# Allegro board Arena_bottom_V1.brd

Outline 298.45 x 206.38 mm; copper layers: TOP, LAYER 1, LAYER 2, LAYER 3, LAYER 4, LAYER 5, BOTTOM. Coordinates in mm from the lower left corner of the outline.
Outline path: 0,193.68 0,81.46 arc(0.97,76.6) 3.72,72.48 72.48,3.72 arc(76.6,0.97) 81.46,0 216.99,0 arc(221.85,0.97) 225.97,3.72 294.73,72.48 arc(297.48,76.6) 298.45,81.46 298.45,193.68 arc(294.73,202.66) 285.75,206.38 253.37,206.38 arc(248.87,204.52) 247.01,200.03 247.01,198.87 arc(149.23,25.4) 51.44,198.87 51.44,200.03 arc(49.58,204.52) 45.09,206.38 12.7,206.38 arc(3.72,202.66) 0,193.68

## Design rules (mm)
constraint set DEFAULT: min track width 0.127

## Placement (name value [footprint] x y rotation side)
C1  10uF  [1206]  263.3 198.74 289.6 bottom
C2  10uF  [1206]  274.55 111.49 250 bottom
C3  0.1uF  [EIA0805]  237.3 17.74 45 top
C4  10uF  [1206]  227.3 37.49 210 bottom
C5  0.1uF  [EIA0805]  269.3 49.74 45 top
C6  0.1uF  [EIA0805]  286.6 126.12 90 top
C7  0.1uF  [0805]  288.3 84.24 270 top
C8  10uF  [1206]  257.55 70.49 230.5 bottom
C9  10uF  [1206]  21.8 123.2 90 bottom
C10  0.1uF  [EIA0805]  25.49 167.15 70 bottom
C11  10uF  [1206]  187.55 16.99 190 bottom
C12  0.1uF  [EIA0805]  261.8 198.24 289.4 bottom
C13  10uF  [1206]  276.8 156.24 270 bottom
C14  0.1uF  [EIA0805]  275.05 156.24 270 bottom
C15  10uF  [1206]  35.05 80.49 110 bottom
C16  0.1uF  [EIA0805]  273.05 112.24 250 bottom
C17  10uF  [1206]  23.83 167.78 70 bottom
C18  0.1uF  [EIA0805]  36.55 81.24 110 bottom
C19  0.1uF  [EIA0805]  272.69 68.82 225 top
C20  10uF  [1206]  143.3 11.24 170 bottom
C21  10uF  [1206]  99.8 20.99 150 bottom
C22  0.1uF  [EIA0805]  100.55 22.49 150 bottom
C23  10uF  [1206]  62.3 45.24 130 bottom
C24  0.1uF  [EIA0805]  252.8 33.24 45 top
C25  0.1uF  [EIA0805]  269.83 65.96 45 top
C26  0.1uF  [EIA0805]  256.3 71.49 230 bottom
C27  0.1uF  [EIA0805]  239.8 20.24 225 top
C28  0.1uF  [EIA0805]  226.55 38.99 210 bottom
C29  0.1uF  [EIA0805]  271.8 52.24 225 top
C30  0.1uF  [EIA0805]  23.58 123.2 90 bottom
C31  0.1uF  [EIA0805]  286.6 129.68 270 top
C32  0.1uF  [EIA0805]  187.3 18.74 190 bottom
C33  0.1uF  [EIA0805]  286.3 94.74 90 top
C34  0.1uF  [EIA0805]  63.55 46.24 130 bottom
C35  0.1uF  [EIA0805]  255.3 35.74 225 top
C36  0.1uF  [EIA0805]  143.55 12.99 170 bottom
C37  0.1uF  [EIA0805]  19.82 188.09 180 top
C38  10uF  [1206]  19.18 192.54 180 top
C39  10uF/6.3/Elec  [1206]  8.39 163.48 270 top
C40  0.001uF/X5R  [EIA0805]  11.09 164.12 270 top
C41  0.1uF/X5R  [EIA0805]  6 164.12 270 top
C42  2.2uF/60/Elec  [1206]  2.35 153.48 270 top
C43  0.01uF/X5R  [EIA0805]  7.91 154.11 270 top
C44  0.1uF/X5R  [EIA0805]  5.37 154.11 270 top
J1  CONN15  [HDR-1X15]  25.13 129.54 90 top
J2  CONN15  [HDR-1X15]  273.32 149.86 270 top
J3  CONN15  [HDR-1X15]  250.82 67.72 230 top
J4  CONN15  [HDR-1X15]  29.14 172.59 70 top
J5  CONN15  [HDR-1X15]  60.7 52.15 130 top
J6  CONN15  [HDR-1X15]  137.68 15.73 170 top
J7  CONN15  [HDR-1X15]  220.07 37.31 210 top
J8  CONN15  [HDR-1X15]  262.36 191.69 290 top
J9  CONN15  [HDR-1X15]  269.31 106.81 250 top
J10  CONN15  [HDR-1X15]  36.09 87.71 110 top
J11  CONN15  [HDR-1X15]  180.78 19.26 190 top
J12  CONN15  [HDR-1X15]  95.98 27.15 150 top
J13  CONN15  [HDR-1X15]  24.36 174.33 70 top
J14  CONN15  [HDR-1X15]  20.05 129.54 90 top
J15  CONN15  [HDR-1X15]  31.31 85.97 110 top
J16  CONN15  [HDR-1X15]  56.8 48.88 130 top
J17  CONN15  [HDR-1X15]  93.44 22.75 150 top
J18  CONN15  [HDR-1X15]  136.8 10.72 170 top
J19  CONN15  [HDR-1X15]  181.66 14.25 190 top
J20  CONN15  [HDR-1X15]  222.61 32.91 210 top
J21  CONN15  [HDR-1X15]  254.71 64.45 230 top
J22  CONN15  [HDR-1X15]  274.09 105.07 250 top
J23  CONN15  [HDR-1X15]  278.4 149.86 270 top
J24  CONN15  [HDR-1X15]  267.14 193.43 290 top
J25  A35051-ND (68pin, 1.27mm pitch, Through hold, A113405-ND)  [SMV_2X20]  286.53 179.88 0 top
J26  HEADER 3  [PJ102A]  22.18 200.26 0 top
L1  Ferrite Bead/5-15Ohm  [EIA2512]  13.29 200.04 90 top
L2  Ferrite Bead/5-15Ohm  [EIA2512]  281.26 186.61 90 top
L3  Ferrite Bead/5-15Ohm  [EIA2512]  2.35 161.89 270 top
L4  Ferrite Bead/5-15Ohm  [EIA2512]  281.26 199.28 90 top
M1  TEST POINT  [8-32]  291.42 199.95 0 top
M2  TEST POINT  [8-32]  7.26 199.95 0 top
M3  TEST POINT  [8-32]  83.19 10.16 0 top
M4  TEST POINT  [8-32]  6.99 114.3 0 top
M5  TEST POINT  [8-32]  6.99 190.5 0 top
M6  TEST POINT  [8-32]  215.27 10.16 0 top
M7  TEST POINT  [8-32]  291.47 190.5 0 top
M8  TEST POINT  [8-32]  291.47 114.3 0 top
NOREF  -  []  1.23 76 0 top
NOREF#2  -  []  208.87 0.39 90 top
NOREF#3  -  []  50.92 202.53 0 top
NOREF#4  -  []  298.45 76.2 0 top
NOREF#5  -  []  297.27 199.03 0 top
NOREF#6  -  []  0 193.68 0 top
NOREF#7  -  []  45.45 187.61 0 top
NOREF#8  -  []  75.45 1.51 0 top
Q1  MTD4P06  [SOT-23]  274.05 203.74 0 top
Q3  MTD4P06  [SOT-23]  274.05 197.24 0 top
R1  27  [EIA0805]  33.8 176.24 160 bottom
R2  27  [EIA0805]  28.3 134.74 180 bottom
R3  27  [EIA0805]  37.3 93.24 200 bottom
R4  27  [EIA0805]  59.8 57.74 220 bottom
R5  27  [EIA0805]  92.8 31.74 240 bottom
R6  27  [EIA0805]  133.3 19.24 260 bottom
R7  27  [EIA0805]  175.3 21.24 280 bottom
R8  27  [EIA0805]  214.3 37.24 300 bottom
R9  27  [EIA0805]  245.3 65.74 320 bottom
R10  27  [EIA0805]  264.8 102.74 340 bottom
R11  27  [EIA0805]  270.8 144.74 0 bottom
R12  27  [EIA0805]  261.8 185.74 20 bottom
R13  200  [EIA0805]  269.8 200.49 0 top
R14  20K  [EIA0805]  269.8 202.49 0 top
R17  200  [EIA0805]  270.3 196.24 0 top
R18  20K  [EIA0805]  274.05 200.49 180 top
R19  4.7K  [EIA0805]  266.66 63.51 135 top
R20  4.7K  [EIA0805]  274.05 193.74 0 top
R21  4.7K  [EIA0402]  282.3 157.24 180 bottom
R22  4.7K  [EIA0402]  282.3 155.74 180 bottom
R23  4.7K  [EIA0402]  295.8 155.74 0 bottom
R24  4.7K  [EIA0402]  295.8 157.24 0 bottom
R25  4.7K  [EIA0402]  295.8 158.24 0 bottom
R26  4.7K  [EIA0402]  295.8 159.74 0 bottom
R27  4.7K  [EIA0402]  295.8 160.74 0 bottom
R28  4.7K  [EIA0402]  295.8 162.24 0 bottom
R29  4.7K  [EIA0402]  295.8 167.24 0 bottom
R30  4.7K  [EIA0402]  295.8 168.74 0 bottom
R31  4.7K  [EIA0402]  295.8 169.74 0 bottom
R32  4.7K  [EIA0402]  295.8 171.24 0 bottom
R33  4.7K  [EIA0402]  282.3 162.24 180 bottom
R34  4.7K  [EIA0402]  282.3 161.24 180 bottom
R35  4.7K  [EIA0402]  282.3 159.74 180 bottom
R36  4.7K  [EIA0402]  282.3 158.24 180 bottom
R37  4.7K  [EIA0402]  225.3 43.24 300 bottom
R38  4.7K  [EIA0402]  174.8 23.74 100 bottom
R39  4.7K  [EIA0402]  133.8 22.24 80 bottom
R40  4.7K  [EIA0402]  94.8 31.24 330 bottom
R41  4.7K  [EIA0402]  61.8 56.74 310 bottom
R42  4.7K  [EIA0402]  38.8 91.74 290 bottom
R43  4.7K  [EIA0402]  29.3 132.74 270 bottom
R44  4.7K  [EIA0402]  33.8 174.24 250 bottom
R49  4.7K  [EIA0402]  260.3 187.24 110 bottom
R50  4.7K  [EIA0402]  269.8 146.74 90 bottom
R51  4.7K  [EIA0402]  290.3 84.24 270 top
R52  4.7K  [EIA0402]  253.8 75.24 320 bottom
R57  4.7K  [EIA0402]  295.8 172.24 0 bottom
R58  4.7K  [EIA0402]  295.8 173.74 0 bottom
R59  4.7K  [EIA0402]  295.8 174.74 0 bottom
R60  4.7K  [EIA0402]  295.8 176.24 0 bottom
RN1  20  [SSOP16]  227.92 16.75 45 top
RN2  20  [SSOP16]  259.67 48.82 45 top
RN3  20  [SSOP16]  292.38 137.4 270 top
RN4  20  [SSOP16]  243.8 32.62 45 top
RN5  20  [SSOP16]  282.85 69.45 225 top
RN6  20  [SSOP16]  292.38 100.25 270 top
U1  SN74LVC8T245  [TSSOP24]  234.91 23.1 225 top
U2  SN74LVC8T245  [TSSOP24]  292.06 127.87 90 top
U3  SN74LVC8T245  [TSSOP24]  266.66 54.85 225 top
U4  SN74LVC8T245  [TSSOP24]  250.47 38.66 225 top
U5  SN74LVC8T245  [TSSOP24]  275.55 63.42 45 top
U6  SN74LVC8T245  [TSSOP24]  292.06 91.04 90 top
U7  LT1764  [DD5]  3.3 169.51 90 top

## Library data of the parts
C1 C2 C4 C8 C9 C11 C13 C15 C17 C20 C21 C23 C38 = CAPACITOR POL
C3 C5-C7 C10 C12 C14 C16 C18 C19 C22 C24-C37 = CAPACITOR NON-POL
C39 C42 = CAPACITOR
C40 C41 C43 C44 = CAP NP
J1-J24 = CONN RECT 15_7
J25 = HEADER 34x2_1
J26 = HEADER 3
L1-L4 = BEADARR_4
M1-M8 = TEST POINT
Q1 Q3 = MTD4P06
R1-R14 R17-R44 R49-R52 R57-R60 = RESISTOR
RN1-RN6 = RESNW_IS_8
U1-U6 = SN7474LVC8T245
U7 = LT1764

## Footprints (pads in the part's own frame, mm; a bottom-side part is the same pattern mirrored in y, then rotated)
8-32
  round 8 hole 4.305: 1(0,0)
0805
  rect 1.1x1.4 smd: 1(-1,0) 2(1,0)
1206
  rect 1.524x1.524 smd: 1(-1.651,0) 2(1.651,0)
DD5
  rect 2.286x1.067 smd: 1(0,0) 2(0,-1.702) 3(0,-3.404) 4(0,-5.105) 5(0,-6.807)
  rect 8.89x10.668 smd: 6(9.906,-3.378)
EIA0402
  rect 0.5x0.65 smd: 1(-0.5,0) 2(0.5,0)
EIA0805
  rect 1.1x1.4 smd: 1(-1,0) 2(1,0)
EIA2512
  rect 1.651x3.175 smd: 1(-3.239,0) 2(3.239,0)
HDR-1X15
  rect 1.524x1.524 hole 1.016: 1(-7.62,0)
  round 1.524 hole 1.016: 2(-5.08,0) 3(-2.54,0) 4(0,0) 5(2.54,0) 6(5.08,0) 7(7.62,0) 8(10.16,0) 9(12.7,0) 10(15.24,0) 11(17.78,0) 12(20.32,0) 13(22.86,0) 14(25.4,0) 15(27.94,0)
PJ102A
  rect 5x2 hole 3.05x0.76: 1(0,-3) 2(0,3)
  rect 2x5 hole 0.76x3.05: 3(-4.7,0)
SMV_2X20
  round 0.2 hole 0.25: (2.31,1.54) (2.31,-25.69)
  rect 4.11x0.73 smd: 1(0,0) 2(0,-1.27) 3(0,-2.54) 4(0,-3.81) 5(0,-5.08) 6(0,-6.35) 7(0,-7.62) 8(0,-8.89) 9(0,-10.16) 10(0,-11.43) 11(0,-12.7) 12(0,-13.97) 13(0,-15.24) 14(0,-16.51) 15(0,-17.78) 16(0,-19.05) 17(0,-20.32) 18(0,-21.59) 19(0,-22.86) 20(0,-24.13) 21(4.62,-24.13) 22(4.62,-22.86) 23(4.62,-21.59) 24(4.62,-20.32) 25(4.62,-19.05) 26(4.62,-17.78) 27(4.62,-16.51) 28(4.62,-15.24) 29(4.62,-13.97) 30(4.62,-12.7) 31(4.62,-11.43) 32(4.62,-10.16) 33(4.62,-8.89) 34(4.62,-7.62) 35(4.62,-6.35) 36(4.62,-5.08) 37(4.62,-3.81) 38(4.62,-2.54) 39(4.62,-1.27) 40(4.62,0)
SOT-23
  rect 1.016x1.219 smd: 1(-0.953,-1.143) 2(0.953,-1.143) 3(0,1.143)
SSOP16
  rect 1.651x0.33 smd: 1(-3.505,2.276) 2(-3.505,1.626) 3(-3.505,0.975) 4(-3.505,0.325) 5(-3.505,-0.325) 6(-3.505,-0.975) 7(-3.505,-1.626) 8(-3.505,-2.276) 9(3.505,-2.276) 10(3.505,-1.626) 11(3.505,-0.975) 12(3.505,-0.325) 13(3.505,0.325) 14(3.505,0.975) 15(3.505,1.626) 16(3.505,2.276)
TSSOP24
  rect 1.651x0.33 smd: 1(-2.87,3.576) 2(-2.87,2.926) 3(-2.87,2.276) 4(-2.87,1.626) 5(-2.87,0.975) 6(-2.87,0.325) 7(-2.87,-0.325) 8(-2.87,-0.975) 9(-2.87,-1.626) 10(-2.87,-2.276) 11(-2.87,-2.926) 12(-2.87,-3.576) 13(2.87,-3.576) 14(2.87,-2.926) 15(2.87,-2.276) 16(2.87,-1.626) 17(2.87,-0.975) 18(2.87,-0.325) 19(2.87,0.325) 20(2.87,0.975) 21(2.87,1.626) 22(2.87,2.276) 23(2.87,2.926) 24(2.87,3.576)

## Nets
3.3VDC: C25.1 C27.1 C29.1 C31.1 C33.1 C35.1 C42.1 C43.1 C44.1 L3.2 R19.2 R21.2 R22.2 R23.2 R24.2 R25.2 R26.2 R27.2 R28.2 R29.2 R30.2 R31.2 R32.2 R33.2 R34.2 R35.2 R36.2 R57.2 R58.2 R59.2 R60.2 U1.1 U1.2 U2.23 U2.24 U3.1 U3.2 U4.1 U4.2 U5.1 U5.2 U6.23 U6.24
5VDC: C1.1 C2.1 C3.1 C4.1 C5.1 C6.1 C7.1 C8.1 C9.1 C10.1 C11.1 C12.1 C13.1 C14.1 C15.1 C16.1 C17.1 C18.1 C19.1 C20.1 C21.1 C22.1 C23.1 C24.1 C26.1 C28.1 C30.1 C32.1 C34.1 C36.1 C37.1 C38.1 J1.1 J2.1 J3.1 J4.1 J5.1 J6.1 J7.1 J8.1 J9.1 J10.1 J11.1 J12.1 J13.1 J14.1 J15.1 J16.1 J17.1 J18.1 J19.1 J20.1 J21.1 J22.1 J23.1 J24.1 J26.1 R20.1 R37.2 R38.2 R39.2 R40.2 R41.2 R42.2 R43.2 R44.2 R49.2 R50.2 R51.2 R52.2 U1.23 U1.24 U2.1 U2.2 U3.23 U3.24 U4.23 U4.24 U5.23 U5.24 U6.1 U6.2 U7.1 U7.2
GND: C1.2 C2.2 C3.2 C4.2 C5.2 C6.2 C7.2 C8.2 C9.2 C10.2 C11.2 C12.2 C13.2 C14.2 C15.2 C16.2 C17.2 C18.2 C19.2 C20.2 C21.2 C22.2 C23.2 C24.2 C25.2 C26.2 C27.2 C28.2 C29.2 C30.2 C31.2 C32.2 C33.2 C34.2 C35.2 C36.2 C37.2 C38.2 C39.2 C40.2 C41.2 C42.2 C43.2 C44.2 J1.2 J2.2 J3.2 J4.2 J5.2 J6.2 J7.2 J8.2 J9.2 J10.2 J11.2 J12.2 J13.2 J14.2 J15.2 J16.2 J17.2 J18.2 J19.2 J20.2 J21.2 J22.2 J23.2 J24.2 J26.2 J26.3 L1.1 L2.2 L4.1 M3.1 M4.1 M5.1 M6.1 M7.1 M8.1 Q1.3(S) Q3.3(S) R14.1 R18.1 U1.11 U1.12 U1.13 U1.22(\\O\E\) U2.11 U2.12 U2.13 U2.22(\\O\E\) U3.11 U3.12 U3.13 U3.22(\\O\E\) U4.11 U4.12 U4.13 U4.22(\\O\E\) U5.11 U5.12 U5.13 U5.22(\\O\E\) U6.7 U6.8 U6.9 U6.10 U6.11 U6.12 U6.13 U6.22(\\O\E\) U7.3 U7.6
GND_SIGNAL: J25.14 J25.27 J25.29 J25.39 J25.40 L2.1
CS0: J1.7 J2.7 J3.7 J4.7 J5.7 J6.7 J7.7 J8.7 J9.7 J10.7 J11.7 J12.7 J13.7 J14.7 J15.7 J16.7 J17.7 J18.7 J19.7 J20.7 J21.7 J22.7 J23.7 J24.7 RN5.4
CS1: J1.8 J2.8 J3.8 J4.8 J5.8 J6.8 J7.8 J8.8 J9.8 J10.8 J11.8 J12.8 J13.8 J14.8 J15.8 J16.8 J17.8 J18.8 J19.8 J20.8 J21.8 J22.8 J23.8 J24.8 RN5.3
CS2: J1.9 J2.9 J3.9 J4.9 J5.9 J6.9 J7.9 J8.9 J9.9 J10.9 J11.9 J12.9 J13.9 J14.9 J15.9 J16.9 J17.9 J18.9 J19.9 J20.9 J21.9 J22.9 J23.9 J24.9 RN5.2
CS3: J1.10 J2.10 J3.10 J4.10 J5.10 J6.10 J7.10 J8.10 J9.10 J10.10 J11.10 J12.10 J13.10 J14.10 J15.10 J16.10 J17.10 J18.10 J19.10 J20.10 J21.10 J22.10 J23.10 J24.10 RN5.1
CS4: J1.11 J2.11 J3.11 J4.11 J5.11 J6.11 J7.11 J8.11 J9.11 J10.11 J11.11 J12.11 J13.11 J14.11 J15.11 J16.11 J17.11 J18.11 J19.11 J20.11 J21.11 J22.11 J23.11 J24.11 RN4.4
CS5: J1.12 J2.12 J3.12 J4.12 J5.12 J6.12 J7.12 J8.12 J9.12 J10.12 J11.12 J12.12 J13.12 J14.12 J15.12 J16.12 J17.12 J18.12 J19.12 J20.12 J21.12 J22.12 J23.12 J24.12 RN4.3
CS6: J1.13 J2.13 J3.13 J4.13 J5.13 J6.13 J7.13 J8.13 J9.13 J10.13 J11.13 J12.13 J13.13 J14.13 J15.13 J16.13 J17.13 J18.13 J19.13 J20.13 J21.13 J22.13 J23.13 J24.13 RN4.2
CS7: J1.14 J2.14 J3.14 J4.14 J5.14 J6.14 J7.14 J8.14 J9.14 J10.14 J11.14 J12.14 J13.14 J14.14 J15.14 J16.14 J17.14 J18.14 J19.14 J20.14 J21.14 J22.14 J23.14 J24.14 RN4.1
CS_IN_0: J25.37 R60.1 U5.7
CS_IN_1: J25.36 R59.1 U5.8
CS_IN_2: J25.35 R58.1 U5.9
CS_IN_3: J25.34 R57.1 U5.10
CS_IN_4: J25.33 R32.1 U4.7
CS_IN_5: J25.32 R31.1 U4.8
CS_IN_6: J25.31 R30.1 U4.9
CS_IN_7: J25.30 R29.1 U4.10
EXT_INT: J1.15 J2.15 J3.15 J4.15 J5.15 J6.15 J7.15 J8.15 J9.15 J10.15 J11.15 J12.15 J13.15 J14.15 J15.15 J16.15 J17.15 J18.15 J19.15 J20.15 J21.15 J22.15 J23.15 J24.15 Q3.2 R20.2
EXT_INT_IN: J25.1 R17.1
MISO_0: R1.1 R44.1 U2.3
MISO_1: R2.1 R43.1 U2.4
MISO_2: R3.1 R42.1 U2.5
MISO_3: R4.1 R41.1 U2.6
MISO_4: R5.1 R40.1 U2.7
MISO_5: R6.1 R39.1 U2.8
MISO_6: R7.1 R38.1 U2.9
MISO_7: R8.1 R37.1 U2.10
MISO_8: R9.1 R52.1 U6.3
MISO_9: R10.1 R51.1 U6.4
MISO_10: R11.1 R50.1 U6.5
MISO_11: R12.1 R49.1 U6.6
MISO_OUT_0: J25.13 RN3.8
MISO_OUT_1: J25.12 RN3.7
MISO_OUT_2: J25.11 RN3.6
MISO_OUT_3: J25.10 RN3.5
MISO_OUT_4: J25.9 RN3.4
MISO_OUT_5: J25.8 RN3.3
MISO_OUT_6: J25.7 RN3.2
MISO_OUT_7: J25.6 RN3.1
MISO_OUT_8: J25.5 RN6.8
MISO_OUT_9: J25.4 RN6.7
MISO_OUT_10: J25.3 RN6.6
MISO_OUT_11: J25.2 RN6.5
MOSI_0: J4.5 J13.5 RN1.8
MOSI_1: J1.5 J14.5 RN1.7
MOSI_2: J10.5 J15.5 RN1.6
MOSI_3: J5.5 J16.5 RN1.5
MOSI_4: J12.5 J17.5 RN1.4
MOSI_5: J6.5 J18.5 RN1.3
MOSI_6: J11.5 J19.5 RN1.2
MOSI_7: J7.5 J20.5 RN1.1
MOSI_8: J3.5 J21.5 RN4.8
MOSI_9: J9.5 J22.5 RN4.7
MOSI_10: J2.5 J23.5 RN4.6
MOSI_11: J8.5 J24.5 RN4.5
MOSI_IN_0: J25.26 R28.1 U1.3
MOSI_IN_1: J25.25 R27.1 U1.4
MOSI_IN_2: J25.24 R26.1 U1.5
MOSI_IN_3: J25.23 R25.1 U1.6
MOSI_IN_4: J25.22 R24.1 U1.7
MOSI_IN_5: J25.21 R23.1 U1.8
MOSI_IN_6: J25.20 R22.1 U1.9
MOSI_IN_7: J25.19 R21.1 U1.10
MOSI_IN_8: J25.18 R36.1 U4.3
MOSI_IN_9: J25.17 R35.1 U4.4
MOSI_IN_10: J25.16 R34.1 U4.5
MOSI_IN_11: J25.15 R33.1 U4.6
RESET: J1.3 J2.3 J3.3 J4.3 J5.3 J6.3 J7.3 J8.3 J9.3 J10.3 J11.3 J12.3 J13.3 J14.3 J15.3 J16.3 J17.3 J18.3 J19.3 J20.3 J21.3 J22.3 J23.3 J24.3 Q1.2
RESET_IN: J25.38 R13.1
SCK_0: J4.4 J13.4 RN2.8
SCK_1: J1.4 J14.4 RN2.7
SCK_2: J10.4 J15.4 RN2.6
SCK_3: J5.4 J16.4 RN2.5
SCK_4: J12.4 J17.4 RN2.4
SCK_5: J6.4 J18.4 RN2.3
SCK_6: J11.4 J19.4 RN2.2
SCK_7: J7.4 J20.4 RN2.1
SCK_8: J3.4 J21.4 RN5.8
SCK_9: J9.4 J22.4 RN5.7
SCK_10: J2.4 J23.4 RN5.6
SCK_11: J8.4 J24.4 RN5.5
SCK_IN_0: J25.28 R19.1 U3.3 U3.4 U3.5 U3.6 U3.7 U3.8 U3.9 U3.10 U5.3 U5.4 U5.5 U5.6
N00182: J4.6 J13.6 R1.2
N04213: J1.6 J14.6 R2.2
N04860: J10.6 J15.6 R3.2
N05048: J5.6 J16.6 R4.2
N06135: J12.6 J17.6 R5.2
N06323: J6.6 J18.6 R6.2
N06511: J11.6 J19.6 R7.2
N06699: J7.6 J20.6 R8.2
N07866: J3.6 J21.6 R9.2
N08054: J9.6 J22.6 R10.2
N08430: J8.6 J24.6 R12.2
N65117: J2.6 J23.6 R11.2
N65750: Q1.1 R13.2 R14.2
N124786: C39.1 C40.1 C41.1 L3.1 U7.4 U7.5(SENSE)
N190316: L4.2 M1.1
N207682: Q3.1 R17.2 R18.2
N926808: RN3.9 U2.21
N926809: RN3.10 U2.20
N935118: RN2.9 U3.21
N935119: RN2.10 U3.20
N953908: RN1.9 U1.21
N953909: RN1.10 U1.20
N1284400: L1.2 M2.1
N9268010: RN3.11 U2.19
N9268011: RN3.12 U2.18
N9268012: RN3.13 U2.17
N9268013: RN3.14 U2.16
N9268014: RN3.15 U2.15
N9268015: RN3.16 U2.14
N9351110: RN2.11 U3.19
N9351111: RN2.12 U3.18
N9351112: RN2.13 U3.17
N9351113: RN2.14 U3.16
N9351114: RN2.15 U3.15
N9351115: RN2.16 U3.14
N9539010: RN1.11 U1.19
N9539011: RN1.12 U1.18
N9539012: RN1.13 U1.17
N9539013: RN1.14 U1.16
N9539014: RN1.15 U1.15
N9539015: RN1.16 U1.14
N10228215: RN4.9 U4.21
N10228216: RN4.10 U4.20
N10228217: RN4.11 U4.19
N10228218: RN4.12 U4.18
N10228219: RN4.13 U4.17
N10228220: RN4.14 U4.16
N10228221: RN4.15 U4.15
N10228222: RN4.16 U4.14
N10904015: RN5.9 U5.21
N10904016: RN5.10 U5.20
N10904017: RN5.11 U5.19
N10904018: RN5.12 U5.18
N10904019: RN5.13 U5.17
N10904020: RN5.14 U5.16
N10904021: RN5.15 U5.15
N10904022: RN5.16 U5.14
N11250315: RN6.9 U6.21
N11250316: RN6.10 U6.20
N11250317: RN6.11 U6.19
N11250318: RN6.12 U6.18
N11250319: RN6.13 U6.17
N11250320: RN6.14 U6.16
N11250321: RN6.15 U6.15
N11250322: RN6.16 U6.14

Pads without a net: RN6 1 2 3 4

## Via types
v1: diameter 0.5, hole 0.25, TOP to BOTTOM, 671 vias

## Routing (per net, layer and track width the routed paths; a pad name or vN(x,y) marks a point on that pad's centre or on a via; arc(x,y) is an arc through that point)
3.3VDC: length 89.7
  TOP w0.127: 0.59,158.65 v1(2.35,158.65) ; v1(2.35,158.65) 4.12,158.65 ; v1(2.35,158.65) 2.35,157.65 ; v1(2.35,158.65) 2.35,159.66 ; 1.41,155.13 C42.1 ; C42.1 2.35,154.19 ; C42.1 2.35,156.07 ; C43.1 7.91,155.84 ; C43.1 7.91,154.38 ; C43.1 8.79,155.11 ; 5.37,154.38 C44.1 5.37,155.84
  TOP w0.2: 287.62,130.68 288.03,130.68 288.09,130.75
  TOP w0.4: v1(282.8,93.74) C33.1 287.33,93.74 287.5,93.91 U6.24 ; v1(240.3,24.74) 239.82,24.26 239.82,23.88 U1.2 U1.1 ; U6.23 U6.24 ; U6.24 288.48,91.92 v1(288.3,91.74) ; v1(264.8,63.24) 265.05,63.49 265.23,63.49 R19.2 267.09,65.36 269.02,65.36 C25.1 270.11,64.27 270.64,64.27 U5.1 271.45,63.46 272.23,64.24 v1(273.3,64.24) ; v1(258.3,39.24) 256.01,36.95 255.02,37.94 U4.1 U4.2 ; C31.1 287.62,130.68 287.69,130.75 U2.24 U2.23 289.13,129.34 289.73,128.74 v1(290.3,128.74) ; 272.01,53.45 v1(272.8,54.24) ; U3.2 U3.1 272.03,55.17 v1(272.22,55.17)
  TOP w0.5: U1.1 239.47,22 C27.1 ; U3.1 272.01,53.56 272.01,53.45 C29.1 ; C35.1 256.01,36.95
  TOP w1: C42.1 4.03,155.13 ; 4.04,155.11 C44.1 C43.1
  BOTTOM w0.4: R29.2 296.3,162.95
  BOTTOM w0.5: R33.2 R34.2 R35.2 R36.2 R21.2 R22.2 281.8,154.74 v1(281.3,154.24) ; v1(295.3,163.74) 295.51,163.74 296.3,162.95 R28.2 R27.2 R26.2 R25.2 R24.2 R23.2 ; v1(296.3,177.24) R60.2 R59.2 R58.2 R57.2 R32.2 R31.2 R30.2 R29.2
  vias: v1(0.8,157.24) v1(0.8,156.24) v1(0.8,153.74) v1(1.3,160.24) v1(1.8,157.24) v1(1.8,156.24) v1(1.8,153.74) v1(2.3,160.24) v1(2.8,157.24) v1(2.8,156.24) v1(2.8,153.74) v1(3.3,160.24) v1(3.8,157.24) v1(3.8,156.24) v1(3.8,153.74) v1(4.8,156.24) v1(5.3,154.24) v1(5.8,156.24) v1(6.8,156.24) v1(6.8,154.24) v1(7.8,156.24) v1(7.8,154.24) v1(8.8,156.24) v1(8.8,155.24) v1(8.8,154.24) v1(9.8,156.24) v1(9.8,155.24) v1(9.8,154.24) v1(258.8,40.24) v1(259.3,40.74) v1(259.3,39.74) v1(259.8,40.24) v1(264.3,62.74) v1(269.3,59.24) v1(269.8,58.74) v1(270.3,58.24) v1(270.8,57.74) v1(271.3,57.24) v1(271.8,56.74) v1(272.3,56.24) v1(272.8,55.74) v1(273.3,55.24) v1(273.8,54.74) v1(274.3,54.24)
5VDC: length 373.4
  TOP w0.127: 3.3,168.19 v1(3.3,169.51) 2.59,169.51 ; 5.01,168.19 U7.2 5.72,169.51
  TOP w0.2: R51.2 289.75,83.74 289.16,84.53 288.45,85.24 C7.1 ; R20.1 v1(271.55,193.74) ; 289.13,126.06 289.82,126.74
  TOP w0.4: U3.24 266.34,49.48 266.34,49.28 v1(265.8,48.74) ; U3.24 U3.23 ; U3.24 267.16,49.98 268.1,49.04 v1(267.3,48.24) ; U4.23 U4.24 ; U4.24 251.04,34.1 252.1,33.04 ; U4.24 250.97,34.91 v1(251.8,35.74) ; v1(274.8,65.74) 274.8,66.82 U5.23 U5.24 274.7,68.33 274.6,68.33 C19.1 ; U1.23 U1.24 234.59,17.73 234.59,17.53 v1(234.3,17.24) ; U6.1 v1(287.87,88.17) ; U6.1 288.48,86.3 v1(288.3,86.12) C7.1 ; U6.1 U6.2 ; C6.1 287.62,125.12 287.74,125 U2.1 U2.2 289.13,126.16 289.72,126.74 v1(290.3,126.74)
  TOP w0.5: C24.1 252.1,33.04 ; U1.24 235.41,18.23 C3.1 236.1,17.04 v1(235.8,16.74) ; C5.1 268.1,49.04
  TOP w1: v1(3.3,169.51) U7.2 ; J26.1 22.18,195.64 20.83,194.29 C38.1 20.83,191.15 20.82,191.14 C37.1
  LAYER 5 w0.127: 21.76,166.23 J13.1 ; J13.1 21.76,168.11 ; J13.1 20.82,167.17 ; J13.1 22.7,167.17 ; 32.98,78.81 J15.1 ; J15.1 33.92,79.75 ; J15.1 34.86,78.81 ; J15.1 33.92,77.87 ; 26.53,165.43 27.47,165.43 ; 26.53,165.43 26.53,164.49 ; 26.53,165.43 25.59,165.43 ; 26.53,165.43 26.53,166.37 ; 145.19,13.46 J6.1 ; J6.1 146.13,14.4 ; J6.1 145.19,15.34 ; J6.1 144.25,14.4 ; 102.58,22.4 J12.1 ; J12.1 103.52,23.34 ; J12.1 102.58,24.28 ; J12.1 101.64,23.34 ; 254.78,73.56 J3.1 ; J3.1 255.72,74.5 ; J3.1 256.66,73.56 ; J3.1 255.72,72.62 ; 143.36,9.4 J18.1 ; J18.1 145.24,9.4 ; J18.1 144.3,8.46 ; J18.1 144.3,10.34 ; 272.38,157.48 J2.1 ; J2.1 274.26,157.48 ; J2.1 273.32,158.42 ; J2.1 273.32,156.54 ; J16.1 61.7,43.99 ; J16.1 60.76,43.05 ; J16.1 61.7,42.11 ; J16.1 62.64,43.05 ; J19.1 189.17,16.51 ; J19.1 190.11,15.57 ; J19.1 189.17,14.63 ; J19.1 188.23,15.57 ; 20.05,120.98 J14.1 ; J14.1 19.11,121.92 ; J14.1 20.05,122.86 ; J14.1 20.99,121.92 ; J9.1 271.92,114.91 ; J9.1 272.86,113.97 ; J9.1 270.98,113.97 ; J9.1 271.92,113.03 ; 276.69,111.29 J22.1 ; J22.1 277.63,112.23 ; J22.1 275.75,112.23 ; J22.1 276.69,113.17 ; J1.1 25.13,122.86 ; J1.1 25.13,120.98 ; J1.1 26.07,121.92 ; J1.1 24.19,121.92 ; 264.53,199.65 J24.1 ; J24.1 263.59,200.59 ; J24.1 265.47,200.59 ; J24.1 264.53,201.53 ; 225.73,41.12 J7.1 ; J7.1 226.67,42.06 ; J7.1 227.61,41.12 ; J7.1 226.67,40.18 ; J23.1 279.34,157.48 ; J23.1 278.4,156.54 ; J23.1 277.46,157.48 ; J23.1 278.4,158.42 ; J26.1 22.18,198.44 ; J26.1 19.51,197.26 ; J26.1 22.18,196.09 ; J26.1 24.86,197.26 ; 259.61,69.35 J21.1 ; J21.1 258.67,70.29 ; J21.1 260.55,70.29 ; J21.1 259.61,71.23 ; 187.34,20.58 188.28,20.58 ; 188.28,20.58 189.22,20.58 ; 188.28,20.58 188.28,21.52 ; 188.28,20.58 188.28,19.64 ; J20.1 229.21,37.66 ; J20.1 230.15,36.72 ; J20.1 228.27,36.72 ; J20.1 229.21,35.78 ; J8.1 259.75,199.79 ; J8.1 260.69,198.85 ; J8.1 259.75,197.91 ; J8.1 258.81,198.85 ; J10.1 39.64,80.55 ; J10.1 38.7,81.49 ; J10.1 38.7,79.61 ; J10.1 37.76,80.55 ; J5.1 66.53,46.31 ; J5.1 64.65,46.31 ; J5.1 65.59,47.25 ; J5.1 65.59,45.37 ; J17.1 100.03,19.88 ; J17.1 100.97,18.94 ; J17.1 100.03,18 ; J17.1 99.09,18.94
  BOTTOM w0.2: J7.1 226.18,41.98 225.79,42.4 R37.2 ; R43.2 29.3,131.77 28.3,122.74 26.12,121.92 J1.1 ; J3.1 254.96,74.19 254.55,74.62 R52.2 ; 26.53,165.43 27.46,165.1 29.65,165.1 30.8,166.24 33.47,173.33 R44.2 ; R39.2 134.43,22.64 144.8,20.74 145.8,19.74 145.36,15.38 J6.1 ; J5.1 66.35,46.95 67.3,49.74 62.43,56 R41.2 ; R40.2 95.65,30.76 103.3,26.74 103.3,24.74 103.07,24.2 J12.1 ; 188.28,20.58 188.11,21.55 187.3,24.74 185.3,26.74 175.26,24.33 R38.2 ; R42.2 39.14,90.83 41.3,82.74 39.63,80.89 J10.1
  BOTTOM w0.4: J18.1 C20.1 ; J6.1 C36.1 ; J3.1 C26.1 ; C18.1 37.14,80.55 J10.1 ; 188.28,20.58 C32.1 ; 23.87,121.92 C30.1 ; J13.1 22.33,167.17 C17.1 ; 26.53,165.43 25.92,165.43 C10.1 ; R49.2 259.16,188.69 259.16,197.58 J8.1 C12.1 ; J17.1 100.03,18.97 C21.1 ; J19.1 C11.1 ; C34.1 65.03,46.31 J5.1 ; J24.1 C1.1 ; J21.1 C8.1 ; J15.1 35.49,78.81 C15.1 ; C22.1 102.58,23.15 J12.1 ; J2.1 269.8,153.97 R50.2 ; 21.43,121.92 C9.1 ; J16.1 62.43,43.05 C23.1 ; J22.1 C2.1 ; J9.1 C16.1 ; J7.1 C28.1 ; J20.1 C4.1
  BOTTOM w0.5: J2.1 274.82,157.48 C14.1 276.15,157.24 C13.1 277.22,157.48 J23.1
  BOTTOM w1: J16.1 62.76,43.94 64.53,45.42 J5.1 ; J20.1 228.52,37.92 227.37,39.92 J7.1 ; J14.1 21.44,121.92 23.74,121.92 J1.1 ; J6.1 144.95,13.04 144.54,10.77 J18.1 ; J8.1 261.06,199.33 263.22,200.11 J24.1 ; J9.1 273.22,113.49 275.39,112.7 J22.1 ; J17.1 100.73,20.14 101.88,22.14 J12.1 ; 26.53,165.43 25.23,165.91 23.06,166.7 J13.1 ; J10.1 37.39,80.07 35.23,79.29 J15.1 ; J3.1 256.78,72.66 258.54,71.18 J21.1 ; 188.28,20.58 188.53,19.21 188.92,16.94 J19.1
  vias: v1(1.3,169.74) v1(1.3,168.74) v1(1.3,167.74) v1(1.3,166.74) v1(2.3,169.74) v1(2.3,168.74) v1(2.3,167.74) v1(2.3,166.74) v1(3.3,167.74) v1(3.3,166.74) v1(4.3,167.74) v1(4.3,166.74) v1(5.3,167.74) v1(5.3,166.74) v1(6.3,167.74) v1(6.3,166.74)
GND: length 1511.5
  TOP w0.127: U2.12 295.63,126.01 ; U2.12 295.63,124 ; U2.12 295.98,125 ; 294.98,124 U2.11 294.98,126.01 ; 141.8,8.9 J18.2 ; J18.2 141.8,10.78 ; J18.2 140.86,9.84 ; J18.2 142.74,9.84 ; 63.02,48.26 J5.2 ; J5.2 63.96,47.32 ; J5.2 64.9,48.26 ; J5.2 63.96,49.2 ; C29.2 271.61,52.05 ; C29.2 271.72,50.92 ; C29.2 270.58,51.02 ; C29.2 270.48,52.16 ; 36.89,82.94 37.83,82.94 ; 37.83,82.94 37.83,82 ; 37.83,82.94 37.83,83.88 ; 37.83,82.94 38.77,82.94 ; 11.53,196.8 L1.1 ; L1.1 13.29,195.8 ; L1.1 15.06,196.8 ; L1.1 13.29,197.8 ; 285.72,127.12 C6.2 ; C6.2 287.48,127.12 ; C6.2 286.6,127.85 ; C6.2 286.6,126.4 ; U5.13 280.35,62.68 ; U5.13 279.4,62.21 ; U5.13 280.82,63.63 ; C27.2 239.61,20.05 ; C27.2 238.58,19.02 ; C27.2 238.48,20.16 ; C27.2 239.72,18.92 ; J13.2 23.57,169.56 ; J13.2 22.63,168.62 ; J13.2 21.69,169.56 ; J13.2 22.63,170.5 ; 272.38,154.94 J2.2 ; J2.2 274.26,154.94 ; J2.2 273.32,155.88 ; J2.2 273.32,154 ; 5.13,163.12 C41.2 ; C41.2 6,163.84 ; C41.2 6,162.39 ; C41.2 6.88,163.12 ; 27.4,166.88 J4.2 ; J4.2 28.34,167.82 ; J4.2 27.4,168.76 ; J4.2 26.46,167.82 ; 16.31,200.26 J26.3 ; J26.3 18.66,200.26 ; J26.3 17.48,202.94 ; L2.2 281.26,190.85 ; L2.2 283.03,189.85 ; L2.2 281.26,188.85 ; L2.2 279.5,189.85 ; 268.08,202.49 R14.1 ; R14.1 268.8,201.62 ; R14.1 269.53,202.49 ; C35.2 255.11,35.55 ; C35.2 253.98,35.66 ; C35.2 254.08,34.52 ; C35.2 255.22,34.42 ; 294.98,89.18 U6.11 294.98,87.17 ; 257.98,67.4 J21.2 ; J21.2 257.98,69.28 ; J21.2 257.04,68.34 ; J21.2 258.92,68.34 ; 289.78,94.92 U6.22 289.78,92.91 ; 234.16,26.49 U1.11 235.58,27.91 ; 294.33,87.17 U6.10 294.33,89.18 ; 269.39,51.07 C5.2 ; C5.2 269.5,49.94 ; C5.2 270.63,49.83 ; C5.2 270.53,50.97 ; J17.2 97.83,21.15 ; J17.2 98.77,20.21 ; J17.2 97.83,19.27 ; J17.2 96.89,20.21 ; 249.72,43.46 U4.12 ; U4.12 249.26,42.51 ; U4.12 250.68,43.93 ; M5.1 11.16,190.5 ; M5.1 2.81,190.5 ; M5.1 6.99,194.68 ; 260.62,195.52 J8.2 ; J8.2 260.62,197.4 ; J8.2 259.68,196.46 ; J8.2 261.56,196.46 ; C24.2 254.03,34.47 ; C24.2 252.89,34.57 ; C24.2 254.13,33.33 ; C24.2 253,33.44 ; 100.38,23.67 J12.2 ; J12.2 99.44,24.61 ; J12.2 100.38,25.55 ; J12.2 101.32,24.61 ; 185.72,15.13 J19.2 ; J19.2 186.66,16.07 ; J19.2 187.6,15.13 ; J19.2 186.66,14.19 ; 245.66,39.4 U4.13 ; U4.13 245.2,38.45 ; U4.13 246.62,39.87 ; 275.26,66.35 U5.22 276.68,67.77 ; 249.72,42.05 251.14,43.47 ; 12.19,179.42 U7.6 1.17,179.42 ; 274.05,197.6 Q3.3 273.37,198.39 ; 287.29,190.5 M7.1 ; M7.1 291.47,194.68 ; M7.1 291.47,186.32 ; M7.1 295.64,190.5 ; C40.2 11.09,163.84 ; C40.2 11.96,163.12 ; C40.2 10.21,163.12 ; C40.2 11.09,162.39 ; 295.63,87.17 U6.12 ; U6.12 295.98,88.17 ; U6.12 295.63,89.18 ; J24.2 265.4,199.14 ; J24.2 265.4,197.26 ; J24.2 266.34,198.2 ; J24.2 264.46,198.2 ; C39.2 9.33,161.83 ; C39.2 8.39,162.77 ; C39.2 7.45,161.83 ; C39.2 8.39,160.89 ; 295.63,129.74 U2.13 ; U2.13 295.98,130.75 ; U2.13 295.63,131.75 ; 254.08,70.67 J3.2 ; J3.2 254.08,72.55 ; J3.2 253.14,71.61 ; J3.2 255.02,71.61 ; C25.2 271.06,67.18 ; C25.2 270.03,66.15 ; C25.2 271.16,66.05 ; C25.2 269.92,67.29 ; C19.2 272.5,68.63 ; C19.2 272.6,67.49 ; C19.2 271.36,68.73 ; C19.2 271.47,67.6 ; 59.13,44.99 J16.2 ; J16.2 60.07,45.93 ; J16.2 61.01,44.99 ; J16.2 60.07,44.05 ; C42.2 2.35,152.76 ; C42.2 2.35,150.88 ; C42.2 1.41,151.82 ; 79.01,10.16 M3.1 ; M3.1 83.19,14.34 ; M3.1 83.19,5.98 ; M3.1 87.36,10.16 ; 278.4,154 J23.2 ; J23.2 279.34,154.94 ; J23.2 278.4,155.88 ; J23.2 277.46,154.94 ; J7.2 225.41,39.85 ; J7.2 224.47,38.91 ; J7.2 223.53,39.85 ; J7.2 224.47,40.79 ; 292.38,87.17 U6.7 292.38,89.18 ; 274.05,204.1 Q1.3 ; Q1.3 274.74,204.89 ; Q1.3 274.05,205.68 ; 33.05,80.26 J15.2 ; J15.2 32.11,81.2 ; J15.2 33.99,81.2 ; J15.2 33.05,82.14 ; M6.1 215.27,14.34 ; M6.1 219.44,10.16 ; M6.1 211.09,10.16 ; M6.1 215.27,5.98 ; 18.09,188.09 C37.2 ; C37.2 18.82,187.22 ; C37.2 19.55,188.09 ; 7.91,152.38 C43.2 8.79,153.11 ; C7.2 288.3,83.97 ; C7.2 287.43,83.24 ; C7.2 288.3,82.52 ; C7.2 289.18,83.24 ; J26.2 24.86,203.26 ; J26.2 22.18,204.44 ; J26.2 19.51,203.26 ; J26.2 22.18,202.09 ; 279.5,196.04 L4.1 ; L4.1 283.03,196.04 ; L4.1 281.26,195.03 ; L4.1 281.26,197.04 ; J22.2 276.76,109.84 ; J22.2 275.82,108.9 ; J22.2 275.82,110.78 ; J22.2 274.88,109.84 ; U6.13 295.98,93.91 ; U6.13 295.63,92.91 ; U6.13 295.63,94.92 ; 141.75,14.85 J6.2 ; J6.2 143.63,14.85 ; J6.2 142.69,15.79 ; 261.86,55.59 U3.13 ; U3.13 261.39,54.64 ; U3.13 262.81,56.06 ; J11.2 186.72,20.14 ; J11.2 184.84,20.14 ; J11.2 185.78,21.08 ; J11.2 185.78,19.2 ; 6.99,110.12 M4.1 ; M4.1 2.81,114.3 ; M4.1 11.16,114.3 ; M4.1 6.99,118.48 ; R18.1 275.05,201.37 ; R18.1 274.33,200.49 ; R18.1 275.05,199.62 ; U5.12 276.76,59.57 ; U5.12 275.34,58.15 ; U5.12 276.29,58.62 ; J9.2 271.05,112.52 ; J9.2 271.05,110.64 ; J9.2 270.11,111.58 ; J9.2 271.99,111.58 ; 25.13,123.52 J1.2 ; J1.2 24.19,124.46 ; J1.2 26.07,124.46 ; J1.2 25.13,125.4 ; C33.2 286.3,96.47 ; C33.2 287.18,95.74 ; C33.2 286.3,95.02 ; C33.2 285.43,95.74 ; 7.42,169.51 U7.3 6,169.51 ; 237.39,19.07 C3.2 ; C3.2 237.5,17.94 ; C3.2 238.53,18.97 ; C3.2 238.63,17.83 ; 20.05,123.52 J14.2 ; J14.2 20.99,124.46 ; J14.2 20.05,125.4 ; J14.2 19.11,124.46 ; J20.2 227.95,35.45 ; J20.2 227.01,34.51 ; J20.2 226.07,35.45 ; J20.2 227.01,36.39 ; 235.2,20.17 U1.22 233.78,18.75 ; 276.3,60.03 U5.11 274.88,58.61 ; 285.72,128.68 C31.2 ; C31.2 286.6,129.41 ; C31.2 286.6,127.95 ; C31.2 287.48,128.68 ; M8.1 295.64,114.3 ; M8.1 291.47,110.12 ; M8.1 287.29,114.3 ; M8.1 291.47,118.48 ; 265.53,50.5 U3.22 266.95,51.92 ; 293.68,87.17 U6.9 293.68,89.18 ; 265.92,59.65 U3.12 ; U3.12 265.45,58.7 ; U3.12 266.87,60.12 ; 16.59,192.54 C38.2 ; C38.2 18.47,192.54 ; C38.2 17.53,191.6 ; 250.76,35.73 U4.22 249.34,34.31 ; 230.11,23.84 U1.13 ; U1.13 U1.12 ; U1.13 229.64,22.89 ; 265.91,58.24 U3.11 267.33,59.66 ; U1.12 234.17,27.9 ; U1.12 235.12,28.37 ; 293.03,89.18 U6.8 293.03,87.17
  TOP w0.2: 288.3,132.74 288.84,132.74 289.78,131.8 U2.22 289.78,129.69 290.23,129.24 ; v1(272.8,204.74) 272.95,204.89 Q1.3 ; v1(275.05,198.49) 274.95,198.39 Q3.3 ; R14.1 v1(268.8,203.74) ; R18.1 v1(276.3,200.49)
  TOP w1: U7.3 v1(6.71,172.24) 6.71,174.32 6.68,174.35 U7.6 6.68,184.49 6.99,184.8 M5.1 ; J26.3 17.48,193.98 17.53,193.93 C38.2 18.82,191.25 C37.2 ; C43.2 C44.2 5.22,153.11 3.93,151.82 C42.2
  LAYER 1 w0.127: J7.2 224.47,40.79 ; J7.2 224.47,38.91 ; J7.2 225.41,39.85 ; J7.2 223.53,39.85 ; 37.83,82.94 38.77,82.94 ; 37.83,82.94 36.89,82.94 ; 37.83,82.94 37.83,82 ; 37.83,82.94 37.83,83.88 ; J19.2 186.66,16.07 ; J19.2 187.6,15.13 ; J19.2 186.66,14.19 ; J19.2 185.72,15.13 ; J11.2 186.72,20.14 ; J11.2 185.78,19.2 ; J11.2 184.84,20.14 ; J11.2 185.78,21.08 ; J24.2 266.34,198.2 ; J24.2 265.4,199.14 ; J24.2 265.4,197.26 ; J24.2 264.46,198.2 ; J18.2 142.74,9.84 ; J18.2 141.8,10.78 ; J18.2 140.86,9.84 ; J18.2 141.8,8.9 ; J4.2 27.4,168.76 ; J4.2 26.46,167.82 ; J4.2 28.34,167.82 ; J4.2 27.4,166.88 ; 254.08,70.67 J3.2 ; J3.2 253.14,71.61 ; J3.2 254.08,72.55 ; J3.2 255.02,71.61 ; J21.2 257.98,69.28 ; J21.2 258.92,68.34 ; J21.2 257.98,67.4 ; J21.2 257.04,68.34 ; M3.1 87.36,10.16 ; M3.1 83.19,5.98 ; M3.1 83.19,14.34 ; M3.1 79.01,10.16 ; J26.3 17.48,202.94 ; J26.3 16.31,200.26 ; J26.3 18.66,200.26 ; J26.3 17.48,197.59 ; M4.1 11.16,114.3 ; M4.1 6.99,118.48 ; M4.1 2.81,114.3 ; M4.1 6.99,110.12 ; 25.13,123.52 J1.2 ; J1.2 25.13,125.4 ; J1.2 26.07,124.46 ; J1.2 24.19,124.46 ; 260.62,195.52 J8.2 ; J8.2 259.68,196.46 ; J8.2 260.62,197.4 ; J8.2 261.56,196.46 ; M6.1 219.44,10.16 ; M6.1 211.09,10.16 ; M6.1 215.27,14.34 ; M6.1 215.27,5.98 ; 273.32,154 J2.2 ; J2.2 273.32,155.88 ; J2.2 274.26,154.94 ; J2.2 272.38,154.94 ; J20.2 227.95,35.45 ; J20.2 227.01,36.39 ; J20.2 227.01,34.51 ; J20.2 226.07,35.45 ; 63.96,47.32 J5.2 ; J5.2 63.96,49.2 ; J5.2 64.9,48.26 ; J5.2 63.02,48.26 ; J16.2 61.01,44.99 ; J16.2 59.13,44.99 ; J16.2 60.07,44.05 ; J16.2 60.07,45.93 ; 21.69,169.56 J13.2 ; J13.2 22.63,170.5 ; J13.2 22.63,168.62 ; J13.2 23.57,169.56 ; 97.83,19.27 J17.2 ; J17.2 98.77,20.21 ; J17.2 97.83,21.15 ; J17.2 96.89,20.21 ; 19.51,203.26 J26.2 ; J26.2 24.86,203.26 ; J26.2 22.18,202.09 ; J26.2 22.18,204.44 ; 291.47,186.32 M7.1 ; M7.1 287.29,190.5 ; M7.1 295.64,190.5 ; M7.1 291.47,194.68 ; 141.75,14.85 J6.2 ; J6.2 143.63,14.85 ; J6.2 142.69,13.91 ; J6.2 142.69,15.79 ; 6.99,186.32 M5.1 ; M5.1 6.99,194.68 ; M5.1 11.16,190.5 ; M5.1 2.81,190.5 ; 270.11,111.58 J9.2 ; J9.2 271.05,112.52 ; J9.2 271.05,110.64 ; J9.2 271.99,111.58 ; 99.44,24.61 J12.2 ; J12.2 100.38,25.55 ; J12.2 101.32,24.61 ; J12.2 100.38,23.67 ; 277.46,154.94 J23.2 ; J23.2 278.4,154 ; J23.2 278.4,155.88 ; J23.2 279.34,154.94 ; 287.29,114.3 M8.1 ; M8.1 295.64,114.3 ; M8.1 291.47,110.12 ; M8.1 291.47,118.48 ; J15.2 33.99,81.2 ; J15.2 33.05,82.14 ; J15.2 32.11,81.2 ; J15.2 33.05,80.26 ; J14.2 20.05,125.4 ; J14.2 19.11,124.46 ; J14.2 20.05,123.52 ; J14.2 20.99,124.46 ; J22.2 276.76,109.84 ; J22.2 274.88,109.84 ; J22.2 275.82,110.78 ; J22.2 275.82,108.9
  LAYER 2 w0.127: M3.1 83.19,14.34 ; M3.1 87.36,10.16 ; M3.1 79.01,10.16 ; M3.1 83.19,5.98 ; 253.14,71.61 J3.2 ; J3.2 255.02,71.61 ; J3.2 254.08,72.55 ; J3.2 254.08,70.67 ; 60.07,44.05 J16.2 ; J16.2 59.13,44.99 ; J16.2 60.07,45.93 ; J16.2 61.01,44.99 ; 22.63,168.62 J13.2 ; J13.2 22.63,170.5 ; J13.2 23.57,169.56 ; J13.2 21.69,169.56 ; J4.2 28.34,167.82 ; J4.2 27.4,168.76 ; J4.2 26.46,167.82 ; J4.2 27.4,166.88 ; J11.2 185.78,21.08 ; J11.2 184.84,20.14 ; J11.2 185.78,19.2 ; J11.2 186.72,20.14 ; 2.81,190.5 M5.1 ; M5.1 6.99,186.32 ; M5.1 11.16,190.5 ; M5.1 6.99,194.68 ; 257.04,68.34 J21.2 ; J21.2 257.98,67.4 ; J21.2 257.98,69.28 ; J21.2 258.92,68.34 ; J15.2 33.05,82.14 ; J15.2 33.99,81.2 ; J15.2 33.05,80.26 ; J15.2 32.11,81.2 ; J1.2 26.07,124.46 ; J1.2 25.13,125.4 ; J1.2 24.19,124.46 ; J1.2 25.13,123.52 ; 2.81,114.3 M4.1 ; M4.1 11.16,114.3 ; M4.1 6.99,118.48 ; M4.1 6.99,110.12 ; J18.2 142.74,9.84 ; J18.2 140.86,9.84 ; J18.2 141.8,10.78 ; J18.2 141.8,8.9 ; 274.88,109.84 J22.2 ; J22.2 275.82,110.78 ; J22.2 276.76,109.84 ; J22.2 275.82,108.9 ; J20.2 227.01,36.39 ; J20.2 227.01,34.51 ; J20.2 226.07,35.45 ; J20.2 227.95,35.45 ; J26.3 17.48,202.94 ; J26.3 17.48,197.59 ; J26.3 18.66,200.26 ; J26.3 16.31,200.26 ; J26.2 22.18,204.44 ; J26.2 22.18,202.09 ; J26.2 24.86,203.26 ; J26.2 19.51,203.26 ; 96.89,20.21 J17.2 ; J17.2 98.77,20.21 ; J17.2 97.83,21.15 ; J17.2 97.83,19.27 ; 291.47,110.12 M8.1 ; M8.1 295.64,114.3 ; M8.1 291.47,118.48 ; M8.1 287.29,114.3 ; J23.2 278.4,155.88 ; J23.2 278.4,154 ; J23.2 277.46,154.94 ; J23.2 279.34,154.94 ; M6.1 219.44,10.16 ; M6.1 211.09,10.16 ; M6.1 215.27,5.98 ; M6.1 215.27,14.34 ; 185.72,15.13 J19.2 ; J19.2 187.6,15.13 ; J19.2 186.66,16.07 ; J19.2 186.66,14.19 ; J24.2 265.4,199.14 ; J24.2 266.34,198.2 ; J24.2 264.46,198.2 ; J24.2 265.4,197.26 ; J7.2 224.47,40.79 ; J7.2 224.47,38.91 ; J7.2 225.41,39.85 ; J7.2 223.53,39.85 ; J5.2 64.9,48.26 ; J5.2 63.96,47.32 ; J5.2 63.96,49.2 ; J5.2 63.02,48.26 ; J2.2 274.26,154.94 ; J2.2 273.32,155.88 ; J2.2 273.32,154 ; J2.2 272.38,154.94 ; J9.2 271.99,111.58 ; J9.2 271.05,110.64 ; J9.2 271.05,112.52 ; 37.83,82.94 38.77,82.94 ; 37.83,82.94 37.83,83.88 ; 37.83,82.94 37.83,82 ; 37.83,82.94 36.89,82.94 ; 260.62,195.52 J8.2 ; J8.2 261.56,196.46 ; J8.2 259.68,196.46 ; J8.2 260.62,197.4 ; 287.29,190.5 M7.1 ; M7.1 291.47,194.68 ; M7.1 295.64,190.5 ; M7.1 291.47,186.32 ; J14.2 20.99,124.46 ; J14.2 20.05,123.52 ; J14.2 20.05,125.4 ; J14.2 19.11,124.46 ; 100.38,23.67 J12.2 ; J12.2 101.32,24.61 ; J12.2 100.38,25.55 ; J12.2 99.44,24.61 ; J6.2 143.63,14.85 ; J6.2 142.69,15.79 ; J6.2 141.75,14.85 ; J6.2 142.69,13.91
  LAYER 3 w0.127: 83.19,5.98 M3.1 ; M3.1 79.01,10.16 ; M3.1 83.19,14.34 ; M3.1 87.36,10.16 ; J1.2 25.13,125.4 ; J1.2 26.07,124.46 ; J1.2 24.19,124.46 ; J1.2 25.13,123.52 ; 37.83,82.94 37.83,83.88 ; 37.83,82.94 38.77,82.94 ; 37.83,82.94 36.89,82.94 ; 37.83,82.94 37.83,82 ; J17.2 98.77,20.21 ; J17.2 96.89,20.21 ; J17.2 97.83,19.27 ; J17.2 97.83,21.15 ; J12.2 101.32,24.61 ; J12.2 99.44,24.61 ; J12.2 100.38,23.67 ; J12.2 100.38,25.55 ; J26.3 17.48,202.94 ; J26.3 18.66,200.26 ; J26.3 16.31,200.26 ; J26.3 17.48,197.59 ; 227.01,34.51 J20.2 ; J20.2 227.95,35.45 ; J20.2 226.07,35.45 ; J20.2 227.01,36.39 ; 60.07,44.05 J16.2 ; J16.2 59.13,44.99 ; J16.2 61.01,44.99 ; J16.2 60.07,45.93 ; J7.2 224.47,40.79 ; J7.2 223.53,39.85 ; J7.2 225.41,39.85 ; J7.2 224.47,38.91 ; J8.2 261.56,196.46 ; J8.2 260.62,195.52 ; J8.2 259.68,196.46 ; J8.2 260.62,197.4 ; 264.46,198.2 J24.2 ; J24.2 265.4,199.14 ; J24.2 266.34,198.2 ; J24.2 265.4,197.26 ; 2.81,114.3 M4.1 ; M4.1 6.99,110.12 ; M4.1 11.16,114.3 ; M4.1 6.99,118.48 ; J2.2 274.26,154.94 ; J2.2 273.32,155.88 ; J2.2 273.32,154 ; J2.2 272.38,154.94 ; J11.2 185.78,21.08 ; J11.2 184.84,20.14 ; J11.2 185.78,19.2 ; J11.2 186.72,20.14 ; M5.1 6.99,194.68 ; M5.1 2.81,190.5 ; M5.1 11.16,190.5 ; M5.1 6.99,186.32 ; 215.27,5.98 M6.1 ; M6.1 211.09,10.16 ; M6.1 219.44,10.16 ; M6.1 215.27,14.34 ; J14.2 20.05,125.4 ; J14.2 20.99,124.46 ; J14.2 20.05,123.52 ; J14.2 19.11,124.46 ; J13.2 22.63,170.5 ; J13.2 21.69,169.56 ; J13.2 23.57,169.56 ; J13.2 22.63,168.62 ; J26.2 22.18,204.44 ; J26.2 19.51,203.26 ; J26.2 22.18,202.09 ; J26.2 24.86,203.26 ; 287.29,114.3 M8.1 ; M8.1 295.64,114.3 ; M8.1 291.47,110.12 ; M8.1 291.47,118.48 ; 26.46,167.82 J4.2 ; J4.2 28.34,167.82 ; J4.2 27.4,166.88 ; J4.2 27.4,168.76 ; J21.2 258.92,68.34 ; J21.2 257.98,67.4 ; J21.2 257.04,68.34 ; J21.2 257.98,69.28 ; J3.2 255.02,71.61 ; J3.2 254.08,72.55 ; J3.2 253.14,71.61 ; J3.2 254.08,70.67 ; 63.02,48.26 J5.2 ; J5.2 64.9,48.26 ; J5.2 63.96,47.32 ; J5.2 63.96,49.2 ; 287.29,190.5 M7.1 ; M7.1 291.47,186.32 ; M7.1 291.47,194.68 ; M7.1 295.64,190.5 ; J18.2 142.74,9.84 ; J18.2 140.86,9.84 ; J18.2 141.8,10.78 ; J18.2 141.8,8.9 ; J22.2 275.82,110.78 ; J22.2 276.76,109.84 ; J22.2 274.88,109.84 ; J22.2 275.82,108.9 ; 142.69,13.91 J6.2 ; J6.2 141.75,14.85 ; J6.2 142.69,15.79 ; J6.2 143.63,14.85 ; 32.11,81.2 J15.2 ; J15.2 33.99,81.2 ; J15.2 33.05,82.14 ; J15.2 33.05,80.26 ; J19.2 187.6,15.13 ; J19.2 185.72,15.13 ; J19.2 186.66,16.07 ; J19.2 186.66,14.19 ; 277.46,154.94 J23.2 ; J23.2 278.4,155.88 ; J23.2 279.34,154.94 ; J23.2 278.4,154 ; 270.11,111.58 J9.2 ; J9.2 271.99,111.58 ; J9.2 271.05,110.64 ; J9.2 271.05,112.52
  LAYER 4 w0.127: 25.13,123.52 J1.2 ; J1.2 26.07,124.46 ; J1.2 24.19,124.46 ; J1.2 25.13,125.4 ; 2.81,190.5 M5.1 ; M5.1 11.16,190.5 ; M5.1 6.99,186.32 ; M5.1 6.99,194.68 ; J12.2 101.32,24.61 ; J12.2 100.38,25.55 ; J12.2 99.44,24.61 ; J12.2 100.38,23.67 ; 2.81,114.3 M4.1 ; M4.1 6.99,110.12 ; M4.1 6.99,118.48 ; M4.1 11.16,114.3 ; 287.29,190.5 M7.1 ; M7.1 291.47,194.68 ; M7.1 295.64,190.5 ; M7.1 291.47,186.32 ; J4.2 28.34,167.82 ; J4.2 26.46,167.82 ; J4.2 27.4,168.76 ; J4.2 27.4,166.88 ; J26.2 22.18,204.44 ; J26.2 19.51,203.26 ; J26.2 24.86,203.26 ; J26.2 22.18,202.09 ; J18.2 142.74,9.84 ; J18.2 141.8,8.9 ; J18.2 140.86,9.84 ; J18.2 141.8,10.78 ; 270.11,111.58 J9.2 ; J9.2 271.05,110.64 ; J9.2 271.99,111.58 ; J9.2 271.05,112.52 ; J2.2 273.32,155.88 ; J2.2 273.32,154 ; J2.2 274.26,154.94 ; J2.2 272.38,154.94 ; M3.1 83.19,14.34 ; M3.1 87.36,10.16 ; M3.1 83.19,5.98 ; M3.1 79.01,10.16 ; J20.2 227.01,36.39 ; J20.2 227.95,35.45 ; J20.2 227.01,34.51 ; J20.2 226.07,35.45 ; 277.46,154.94 J23.2 ; J23.2 278.4,155.88 ; J23.2 278.4,154 ; J23.2 279.34,154.94 ; 186.66,14.19 J19.2 ; J19.2 185.72,15.13 ; J19.2 186.66,16.07 ; J19.2 187.6,15.13 ; 257.04,68.34 J21.2 ; J21.2 257.98,69.28 ; J21.2 257.98,67.4 ; J21.2 258.92,68.34 ; 185.78,19.2 J11.2 ; J11.2 184.84,20.14 ; J11.2 185.78,21.08 ; J11.2 186.72,20.14 ; M8.1 291.47,118.48 ; M8.1 291.47,110.12 ; M8.1 295.64,114.3 ; M6.1 215.27,14.34 ; M6.1 219.44,10.16 ; M6.1 211.09,10.16 ; M6.1 215.27,5.98 ; 254.08,70.67 J3.2 ; J3.2 254.08,72.55 ; J3.2 255.02,71.61 ; J3.2 253.14,71.61 ; J14.2 20.05,125.4 ; J14.2 20.99,124.46 ; J14.2 20.05,123.52 ; J14.2 19.11,124.46 ; 97.83,19.27 J17.2 ; J17.2 96.89,20.21 ; J17.2 98.77,20.21 ; J17.2 97.83,21.15 ; J22.2 276.76,109.84 ; J22.2 275.82,108.9 ; J22.2 275.82,110.78 ; J22.2 274.88,109.84 ; J8.2 261.56,196.46 ; J8.2 259.68,196.46 ; J8.2 260.62,197.4 ; J8.2 260.62,195.52 ; J15.2 33.05,82.14 ; J15.2 33.05,80.26 ; J15.2 32.11,81.2 ; J15.2 33.99,81.2 ; 224.47,38.91 J7.2 ; J7.2 224.47,40.79 ; J7.2 225.41,39.85 ; J7.2 223.53,39.85 ; J6.2 143.63,14.85 ; J6.2 141.75,14.85 ; J6.2 142.69,13.91 ; J6.2 142.69,15.79 ; 36.89,82.94 37.83,82.94 ; 37.83,82.94 38.77,82.94 ; 37.83,82.94 37.83,82 ; 37.83,82.94 37.83,83.88 ; 17.48,197.59 J26.3 ; J26.3 16.31,200.26 ; J26.3 18.66,200.26 ; J26.3 17.48,202.94 ; J24.2 265.4,199.14 ; J24.2 265.4,197.26 ; J24.2 266.34,198.2 ; J24.2 264.46,198.2 ; J5.2 64.9,48.26 ; J5.2 63.96,47.32 ; J5.2 63.96,49.2 ; J5.2 63.02,48.26 ; J13.2 23.57,169.56 ; J13.2 21.69,169.56 ; J13.2 22.63,170.5 ; J13.2 22.63,168.62 ; 60.07,44.05 J16.2 ; J16.2 61.01,44.99 ; J16.2 59.13,44.99 ; J16.2 60.07,45.93
  BOTTOM w0.127: 215.27,5.98 M6.1 ; M6.1 215.27,14.34 ; M6.1 211.09,10.16 ; M6.1 219.44,10.16 ; J26.3 17.48,202.94 ; J26.3 18.66,200.26 ; J26.3 16.31,200.26 ; J26.3 17.48,197.59 ; 37.83,82.94 38.77,82.94 ; 37.83,82.94 37.83,83.88 ; 37.83,82.94 37.83,82 ; C23.2 61.96,47.11 ; C23.2 61.85,45.79 ; C23.2 60.52,45.91 ; C23.2 60.64,47.23 ; 21.8,123.91 C9.2 21.8,125.79 ; 275.82,108.9 J22.2 ; J22.2 276.76,109.84 ; J22.2 275.82,110.78 ; 26.08,168.77 C10.2 25.58,167.4 ; J7.2 225.41,39.85 ; J7.2 224.47,40.79 ; J7.2 223.53,39.85 ; J7.2 224.47,38.91 ; 185,16.54 C11.2 ; C11.2 186.85,16.87 ; C11.2 185.76,17.63 ; 256.13,71.29 C26.2 255.19,70.17 ; J3.2 254.08,72.55 ; J3.2 253.14,71.61 ; J3.2 255.02,71.61 ; J3.2 254.08,70.67 ; C17.2 24.72,170.22 ; C17.2 25.28,169.01 ; C17.2 24.08,168.45 ; 140.75,11.69 C20.2 142.6,11.37 ; 261.89,197.99 C12.2 262.38,196.61 ; 143.29,13.04 C36.2 141.85,13.29 ; 20.05,123.52 J14.2 ; J14.2 19.11,124.46 ; J14.2 20.05,125.4 ; J12.2 101.32,24.61 ; J12.2 100.38,23.67 ; J12.2 100.38,25.55 ; J12.2 99.44,24.61 ; 257.1,69.95 C8.2 255.91,68.49 ; 6.99,186.32 M5.1 ; M5.1 11.16,190.5 ; M5.1 6.99,194.68 ; M5.1 2.81,190.5 ; M3.1 87.36,10.16 ; M3.1 79.01,10.16 ; M3.1 83.19,5.98 ; M3.1 83.19,14.34 ; 273.11,110.26 C2.2 ; C2.2 273.67,109.06 ; C2.2 274.31,110.83 ; 276.8,155.53 C13.2 276.8,153.65 ; J2.2 273.32,155.88 ; J2.2 272.38,154.94 ; J2.2 273.32,154 ; J21.2 258.92,68.34 ; J21.2 257.98,69.28 ; J21.2 257.98,67.4 ; J17.2 98.77,20.21 ; J17.2 96.89,20.21 ; J17.2 97.83,19.27 ; 63.96,47.32 J5.2 ; J5.2 63.96,49.2 ; J5.2 63.02,48.26 ; J5.2 64.9,48.26 ; 22.18,202.09 J26.2 ; J26.2 22.18,204.44 ; J26.2 24.86,203.26 ; J26.2 19.51,203.26 ; J16.2 61.01,44.99 ; J16.2 60.07,45.93 ; J16.2 59.13,44.99 ; J16.2 60.07,44.05 ; J11.2 186.72,20.14 ; J11.2 184.84,20.14 ; J11.2 185.78,21.08 ; 226.07,35.45 J20.2 ; J20.2 227.01,34.51 ; J20.2 227.95,35.45 ; 186.66,14.19 J19.2 ; J19.2 187.6,15.13 ; J19.2 185.72,15.13 ; 23.58,124.93 C30.2 23.58,123.48 ; J23.2 278.4,155.88 ; J23.2 279.34,154.94 ; J23.2 278.4,154 ; J15.2 33.05,82.14 ; J15.2 32.11,81.2 ; J15.2 33.05,80.26 ; 63.38,46.45 C34.2 62.44,47.57 ; 100.32,22.63 C22.2 99.06,23.36 ; 275.05,155.97 C14.2 275.05,154.52 ; 225.06,38.13 C28.2 226.32,38.86 ; 34.17,82.93 C15.2 34.81,81.16 ; 263.54,198.07 C1.2 ; C1.2 262.97,196.87 ; C1.2 264.17,196.3 ; J24.2 265.4,199.14 ; J24.2 266.34,198.2 ; J24.2 265.4,197.26 ; 21.69,169.56 J13.2 ; J13.2 22.63,170.5 ; J13.2 22.63,168.62 ; 291.47,110.12 M8.1 ; M8.1 287.29,114.3 ; M8.1 291.47,118.48 ; 225.06,36.2 C4.2 ; C4.2 226.69,37.14 ; C4.2 225.4,37.48 ; M7.1 291.47,194.68 ; M7.1 291.47,186.32 ; M7.1 295.64,190.5 ; M7.1 287.29,190.5 ; J1.2 26.07,124.46 ; J1.2 25.13,125.4 ; J1.2 25.13,123.52 ; M4.1 11.16,114.3 ; M4.1 6.99,118.48 ; M4.1 6.99,110.12 ; 259.68,196.46 J8.2 ; J8.2 260.62,195.52 ; J8.2 260.62,197.4 ; 272.96,111.99 C16.2 272.46,110.62 ; 271.05,110.64 J9.2 ; J9.2 271.05,112.52 ; J9.2 270.11,111.58 ; 187.04,18.7 C32.2 185.6,18.44 ; 99.19,21.35 C21.2 97.56,22.29 ; J4.2 28.34,167.82 ; J4.2 27.4,166.88 ; J4.2 27.4,168.76 ; 141.75,14.85 J6.2 ; J6.2 142.69,15.79 ; J6.2 143.63,14.85 ; 35.96,82.87 C18.2 36.46,81.5 ; J18.2 142.74,9.84 ; J18.2 141.8,8.9 ; J18.2 140.86,9.84
  BOTTOM w1: J13.2 J4.2 ; J11.2 J19.2 ; J15.2 37.83,82.94 ; J16.2 J5.2 ; J23.2 J2.2 ; J8.2 J24.2 ; J17.2 J12.2 ; J3.2 J21.2 ; J18.2 J6.2 ; J9.2 J22.2 ; J20.2 J7.2 ; J1.2 J14.2
  vias: v1(3.3,186.74) v1(3.3,185.74) v1(3.3,184.74) v1(3.3,183.74) v1(3.3,182.74) v1(3.3,181.74) v1(3.3,180.74) v1(3.3,179.74) v1(3.3,178.74) v1(3.3,177.74) v1(3.3,176.74) v1(3.3,175.74) v1(3.3,174.24) v1(3.3,173.24) v1(3.3,172.24) v1(4.3,186.74) v1(4.3,185.74) v1(4.3,184.74) v1(4.3,183.74) v1(4.3,182.74) v1(4.3,181.74) v1(4.3,180.74) v1(4.3,179.74) v1(4.3,178.74) v1(4.3,177.74) v1(4.3,176.74) v1(4.3,175.74) v1(4.3,174.24) v1(4.3,173.24) v1(4.3,172.24) v1(5.3,185.74) v1(5.3,184.74) v1(5.3,183.74) v1(5.3,182.74) v1(5.3,181.74) v1(5.3,180.74) v1(5.3,179.74) v1(5.3,178.74) v1(5.3,177.74) v1(5.3,176.74) v1(5.3,175.74) v1(5.3,174.24) v1(5.3,173.24) v1(5.3,172.24) v1(6.71,184.74) v1(6.71,181.74) v1(6.71,178.74) v1(6.71,175.74) v1(8.3,185.74) v1(8.3,184.74) v1(8.3,183.74) v1(8.3,182.74) v1(8.3,181.74) v1(8.3,180.74) v1(8.3,179.74) v1(8.3,178.74) v1(8.3,177.74) v1(8.3,176.74) v1(8.3,175.74) v1(8.3,174.24) v1(8.3,173.24) v1(8.3,172.24) v1(9.3,186.74) v1(9.3,185.74) v1(9.3,184.74) v1(9.3,183.74) v1(9.3,182.74) v1(9.3,181.74) v1(9.3,180.74) v1(9.3,179.74) v1(9.3,178.74) v1(9.3,177.74) v1(9.3,176.74) v1(9.3,175.74) v1(9.3,174.24) v1(9.3,173.24) v1(9.3,172.24) v1(10.3,186.74) v1(10.3,185.74) v1(10.3,184.74) v1(10.3,183.74) v1(10.3,182.74) v1(10.3,181.74) v1(10.3,180.74) v1(10.3,179.74) v1(10.3,178.74) v1(10.3,177.74) v1(10.3,176.74) v1(10.3,175.74) v1(10.3,174.24) v1(10.3,173.24) v1(10.3,172.24) v1(12.3,196.74) v1(12.3,195.74) v1(12.3,194.74) v1(12.3,191.74) v1(12.3,190.74) v1(12.3,189.74) v1(12.3,188.24) v1(12.3,187.24) v1(12.3,186.24) v1(12.3,184.74) v1(12.3,183.74) v1(12.3,182.74) v1(12.3,181.74) v1(12.3,180.74) v1(12.3,179.74) v1(12.3,178.74) v1(12.3,177.74) v1(12.3,176.74) v1(12.3,175.74) v1(12.3,174.74) v1(12.3,173.74) v1(12.8,163.24) v1(12.8,162.24) v1(12.8,161.24) v1(12.8,160.24) v1(12.8,159.24) v1(12.8,158.24) v1(13.3,196.74) v1(13.3,195.74) v1(13.3,194.74) v1(13.3,191.74) v1(13.3,190.74) v1(13.3,189.74) v1(13.3,188.24) v1(13.3,187.24) v1(13.3,186.24) v1(13.3,184.74) v1(13.3,183.74) v1(13.3,182.74) v1(13.3,181.74) v1(13.3,180.74) v1(13.3,179.74) v1(13.3,178.74) v1(13.3,177.74) v1(13.3,176.74) v1(13.3,175.74) v1(13.3,174.74) v1(13.3,173.74) v1(13.8,163.24) v1(13.8,162.24) v1(13.8,161.24) v1(13.8,160.24) v1(13.8,159.24) v1(13.8,158.24) v1(14.3,196.74) v1(14.3,195.74) v1(14.3,194.74) v1(14.3,193.15) v1(14.3,191.74) v1(14.3,190.74) v1(14.3,189.74) v1(14.3,188.24) v1(14.3,187.24) v1(14.3,186.24) v1(14.3,184.74) v1(14.3,183.74) v1(14.3,182.74) v1(14.3,181.74) v1(14.3,180.74) v1(14.3,179.74) v1(14.3,178.74) v1(14.3,177.74) v1(14.3,176.74) v1(14.3,175.74) v1(14.3,174.74) v1(14.3,173.74) v1(14.8,163.24) v1(14.8,162.24) v1(14.8,161.24) v1(14.8,160.24) v1(14.8,159.24) v1(14.8,158.24) v1(19.8,201.24) v1(19.8,200.24) v1(20.8,201.24) v1(20.8,200.24) v1(21.8,201.24) v1(21.8,200.24) v1(23.21,200.24) v1(24.8,201.24) v1(24.8,200.24) v1(25.8,202.24) v1(25.8,201.24) v1(25.8,200.24) v1(26.8,202.24) v1(26.8,201.24) v1(26.8,200.24) v1(241.48,33.57) v1(242.18,34.28) v1(242.18,32.87) v1(242.89,34.99) v1(242.89,33.57) v1(242.89,32.16) v1(243.6,34.28) v1(243.6,32.87) v1(243.6,31.45) v1(244.3,33.57) v1(244.3,32.16) v1(244.3,30.74) v1(245.01,32.87) v1(245.01,31.45) v1(245.72,32.16) v1(258.48,49.07) v1(259.18,49.78) v1(259.18,48.37) v1(259.89,50.49) v1(259.89,49.07) v1(259.89,47.66) v1(260.6,49.78) v1(260.6,48.37) v1(260.6,46.95) v1(261.3,49.07) v1(261.3,47.66) v1(261.3,46.24) v1(262.01,48.37) v1(262.01,46.95) v1(262.72,47.66) v1(264.98,55.07) v1(265.68,55.78) v1(265.68,54.37) v1(266.39,56.49) v1(266.39,55.07) v1(266.39,53.66) v1(267.1,55.78) v1(267.1,54.37) v1(267.1,52.95) v1(267.8,55.07) v1(267.8,53.66) v1(267.8,52.24) v1(268.51,54.37) v1(268.51,52.95) v1(269.22,53.66) v1(274.18,64.78) v1(274.18,63.37) v1(274.89,64.07) v1(274.89,62.66) v1(275.6,64.78) v1(275.6,63.37) v1(275.6,61.95) v1(276.3,64.07) v1(276.3,62.66) v1(276.3,61.24) v1(277.01,63.37) v1(277.01,61.95) v1(277.72,62.66) v1(290.3,138.24) v1(290.3,137.24) v1(290.3,136.24) v1(290.3,127.74) v1(290.3,101.74) v1(290.3,100.74) v1(290.3,99.74) v1(291.3,138.24) v1(291.3,137.24) v1(291.3,136.24) v1(291.3,128.74) v1(291.3,127.74) v1(291.3,126.74) v1(291.3,101.74) v1(291.3,100.74) v1(291.3,99.74) v1(291.3,91.74) v1(291.3,90.74) v1(291.3,89.74) v1(292.3,138.24) v1(292.3,137.24) v1(292.3,136.24) v1(292.3,128.74) v1(292.3,127.74) v1(292.3,126.74) v1(292.3,101.74) v1(292.3,100.74) v1(292.3,99.74) v1(292.3,91.74) v1(292.3,90.74) v1(292.3,89.74) v1(293.3,138.24) v1(293.3,137.24) v1(293.3,136.24) v1(293.3,128.74) v1(293.3,127.74) v1(293.3,126.74) v1(293.3,101.74) v1(293.3,100.74) v1(293.3,99.74) v1(293.3,91.74) v1(293.3,90.74) v1(293.3,89.74) v1(294.3,138.24) v1(294.3,137.24) v1(294.3,136.24) v1(294.3,128.74) v1(294.3,127.74) v1(294.3,126.74) v1(294.3,101.74) v1(294.3,100.74) v1(294.3,99.74) v1(294.3,91.74) v1(294.3,90.74) v1(294.3,89.74) v1(295.3,91.74) v1(295.3,90.74) v1(295.3,89.74)
GND_SIGNAL: length 22.2
  TOP w0.127: 281.26,182.37 281.26,183.37 ; 281.26,183.37 279.5,183.37 ; 281.26,183.37 281.26,184.38
  TOP w0.4: J25.29 v1(294.36,165.91) ; J25.40 v1(294.36,179.88) ; J25.14 v1(283.33,163.37) ; J25.39 v1(294.36,178.61) ; J25.27 v1(294.36,163.37)
  TOP w1: 281.26,183.37 v1(283.67,183.37)
  vias: v1(279.8,185.24) v1(279.8,181.74) v1(280.8,185.24) v1(281.8,185.24) v1(281.8,181.74) v1(282.8,185.24) v1(282.8,181.74) v1(283.8,185.24) v1(283.8,184.24) v1(283.8,182.24) v1(284.8,185.24) v1(284.8,184.24) v1(284.8,183.24) v1(284.8,182.24) v1(285.8,184.24) v1(285.8,183.24) v1(285.8,182.24)
CS0: length 626
  TOP w0.127: v1(37.37,179.17) 32.99,167.16 arc(31.35,161.05) 30.8,154.74 v1(30.8,137.24) 30.8,115.69 32.43,114.06 v1(38.73,96.75) 43.8,82.82 arc(45.78,78.8) 48.59,75.3 v1(59.66,62.1) 60.8,60.74 76.92,44.62 v1(91.89,35.99) 105.22,28.29 arc(109.26,26.61) 113.59,26.04 v1(131.17,22.94) 132.3,22.74 154.3,22.74 156.31,20.74 v1(172.01,23.51) 189.95,26.67 arc(193.13,27.75) 195.85,29.74 v1(210.63,38.28) 218.02,42.55 arc(224.62,46.96) 230.59,52.19 v1(241.75,65.49) 253.46,79.44 arc(254.09,80.29) v1(254.63,81.21) arc(255.38,83.26) 255.63,85.42 v1(261.46,101.41) 266.93,116.46 arc(267.96,120.29) 268.3,124.24 v1(268.3,142.24) 268.3,159.98 arc(267.67,163.16) 265.87,165.85 v1(259.82,182.49) ; RN5.4 v1(286.67,72.82)
  BOTTOM w0.127: v1(172.01,23.51) J11.7 ; J2.7 271.66,142.24 271.66,142.24 v1(268.3,142.24) ; v1(286.67,72.82) 284.3,70.74 v1(254.63,81.21) ; v1(91.89,35.99) J12.7 ; v1(37.37,179.17) 36.78,179.75 J4.7 ; J1.7 25.22,137.24 v1(30.8,137.24) ; 33.48,94.87 v1(38.73,96.75) ; v1(241.75,65.49) J3.7 ; v1(259.82,182.49) J8.7 ; v1(261.46,101.41) J9.7 ; v1(210.63,38.28) J7.7 ; 55.8,57.99 v1(59.66,62.1) ; v1(131.17,22.94) J6.7
  BOTTOM w1: J1.7 J14.7 ; J17.7 J12.7 ; J2.7 277.01,142.24 277.01,142.24 J23.7 ; J13.7 J4.7 ; J3.7 J21.7 ; J15.7 33.48,94.87 ; J7.7 J20.7 ; J19.7 J11.7 ; J18.7 J6.7 ; J9.7 J22.7 ; J8.7 J24.7 ; J16.7 55.8,57.99
